# EAGLE board ProjectoArduino_04_Color Mixing Lamp (EAGLE 7.6.0)

Size 56.82 x 53.33 mm. Coordinates in mm from the lower left corner, seen from the top.
Outline: 0,0 56.82,0 56.82,53.33 0,53.33 0,0
Copper layers (1*16): Top 0.035mm / dielectric 1.5mm / Bottom 0.035mm
Design rules "default": minimum track width 10mil, minimum drill 24mil, track to track 8mil, track to pad 8mil, pad to pad 8mil, via to via 8mil, smd to smd 8mil, copper to edge 40mil, drill to drill 8mil, minimum pad ring 10mil, minimum via ring 8mil, stop-mask expansion 4mil, vias tented up to drill 0mil, thermal gap 10mil

## Footprints (pad centres in the part's own frame; a part is rotated, then mirrored left to right if it is on the bottom)
LED-RGB-THRU = drill 0.762 pad 0.889 long: 1 1.905,0; 2 0.635,0; 3 -0.635,0; 4 -1.905,0
PHOTORESISTOR-2.54 = drill 1 pad 1.5: P$1 -1.27,0; P$2 1.27,0

## Placement (x,y rotation side)
D1  [LED-RGB-THRU]  5,10.08 0 top
R4  [PHOTORESISTOR-2.54]  5,22.78 0 top
R5  [PHOTORESISTOR-2.54]  5,35.48 0 top
R6  [PHOTORESISTOR-2.54]  5,48.18 0 top

## Library data of the parts
D1 R4-R6 = AUTODESK_CIRCUITS_BREADBOARD

## Nets
N$1: R4.P$2 R5.P$2 R6.P$2
N$2: D1.2
N$6: R4.P$1
N$7: R5.P$1
N$8: R6.P$1
N$9: D1.3
N$10: D1.4
N$11: D1.1

## Tracks (layer width: path | path; a pad name or v marks a point on that pad's centre or on a via)
N$1  (2 unrouted)